# Altium PCB version1.PcbDoc
Units mm, origin at the board's own origin, x right, y up, seen from the top; angles counter-clockwise.
Board outline 125.09 x 91.69 mm, 2 copper layers (Top Layer, Bottom Layer); 43 components, 105 nets, 227 pads, 32 vias.
Unrouted connection lines stored in the file: 3.
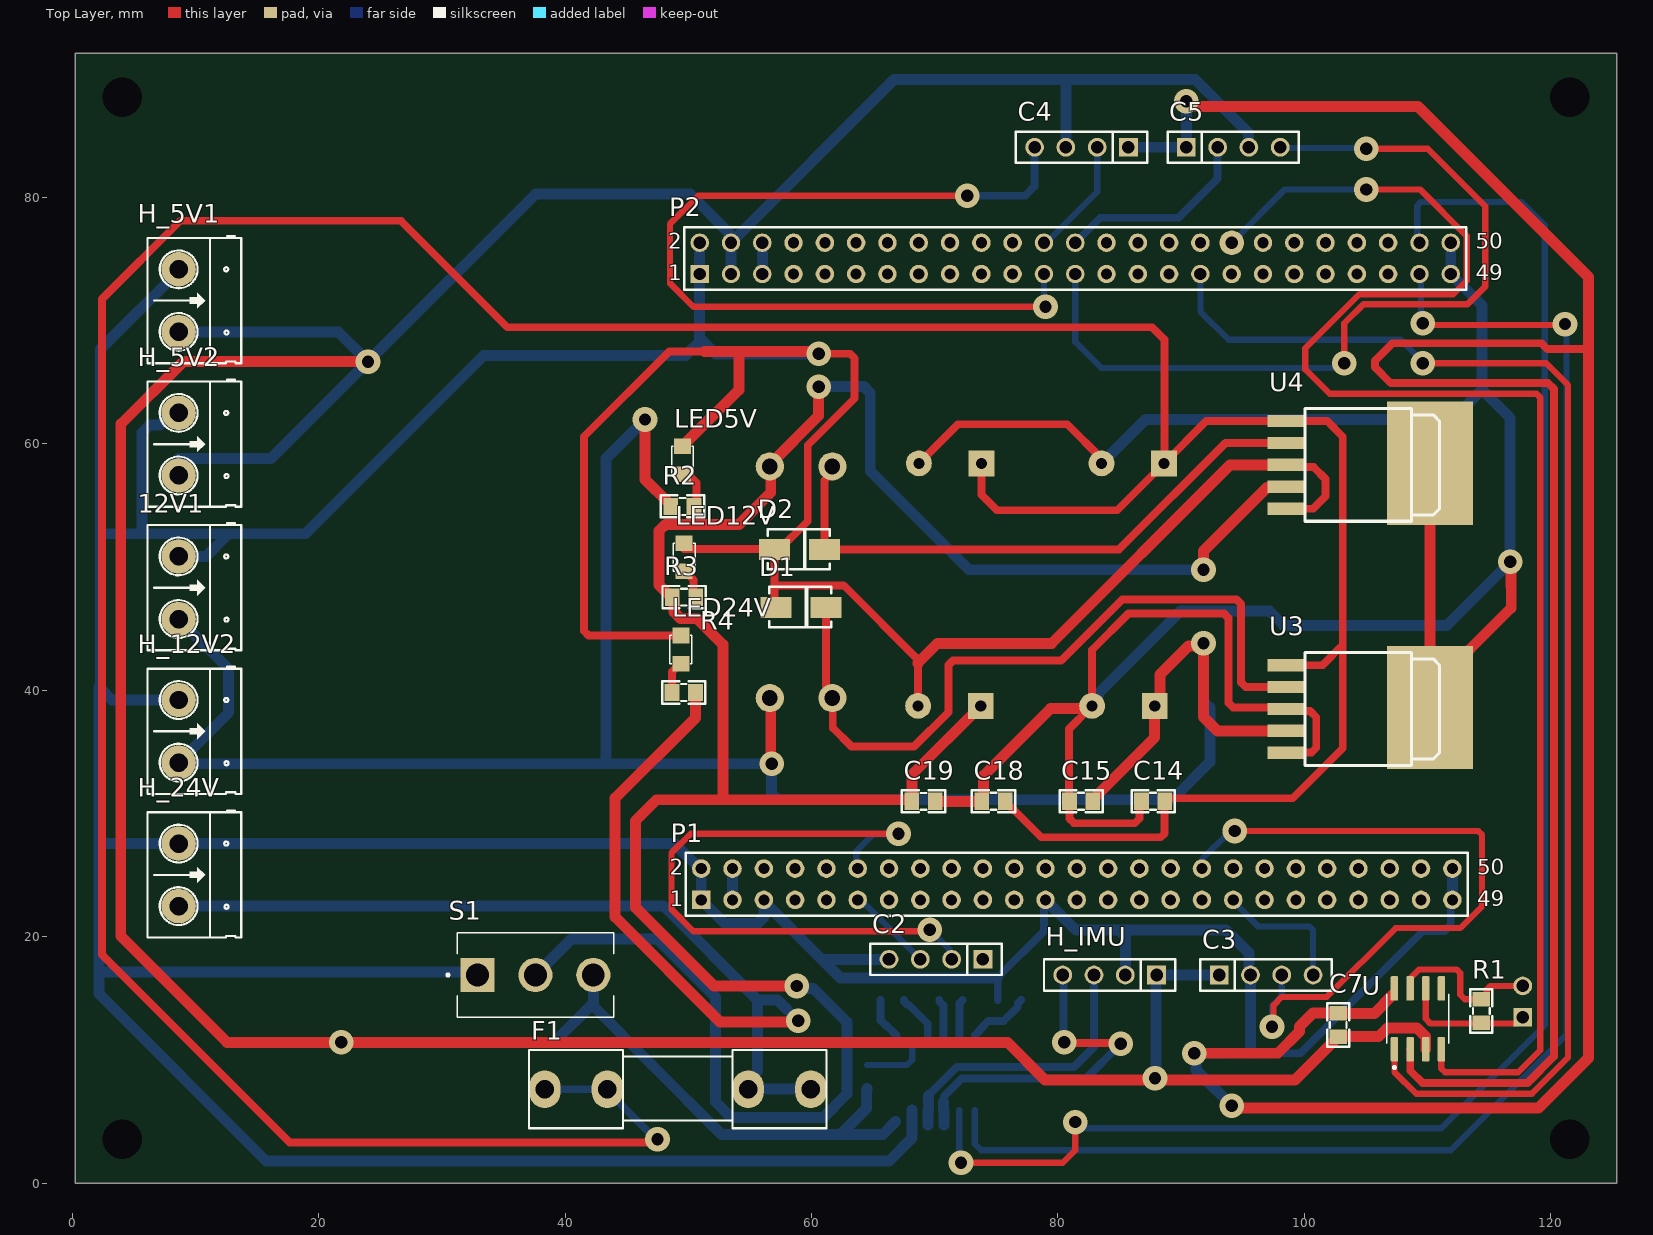
[diagram p0: Top Layer view]
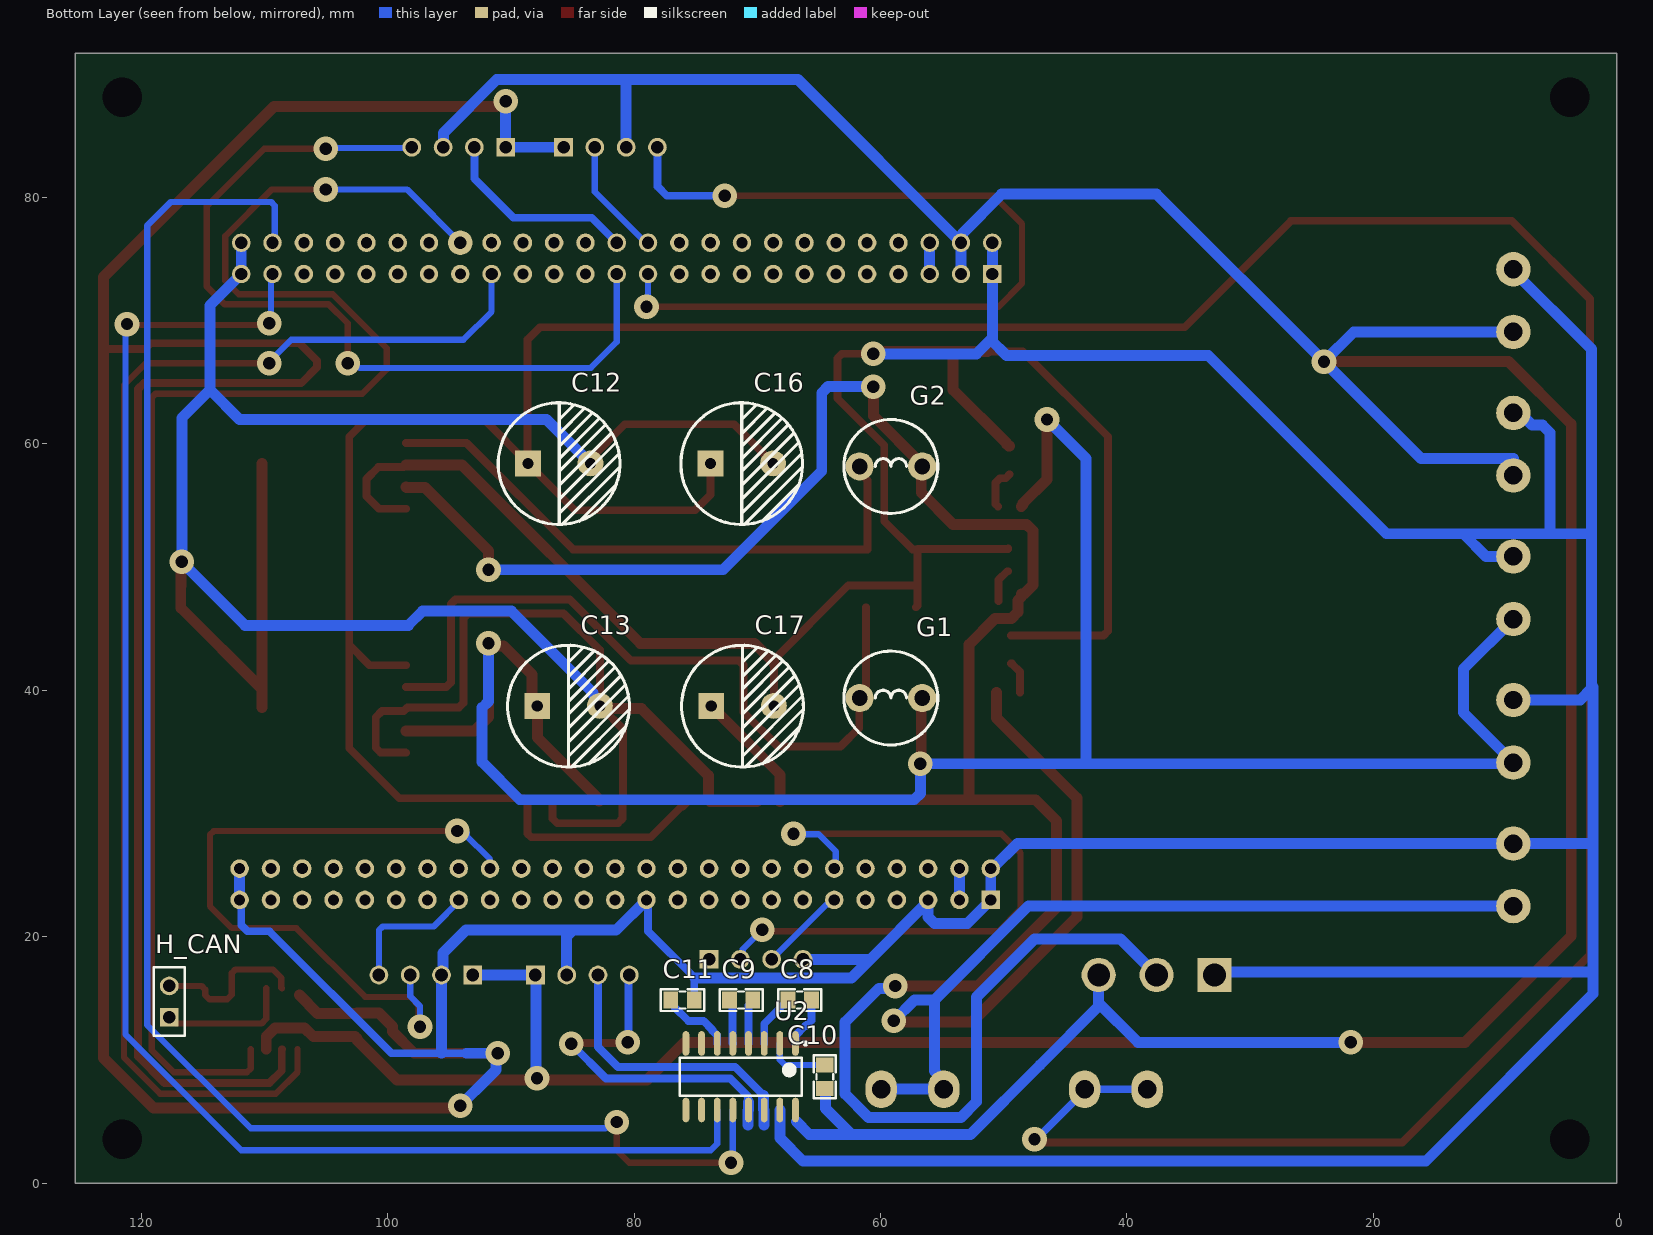
[diagram p1: Bottom Layer view, seen from below]
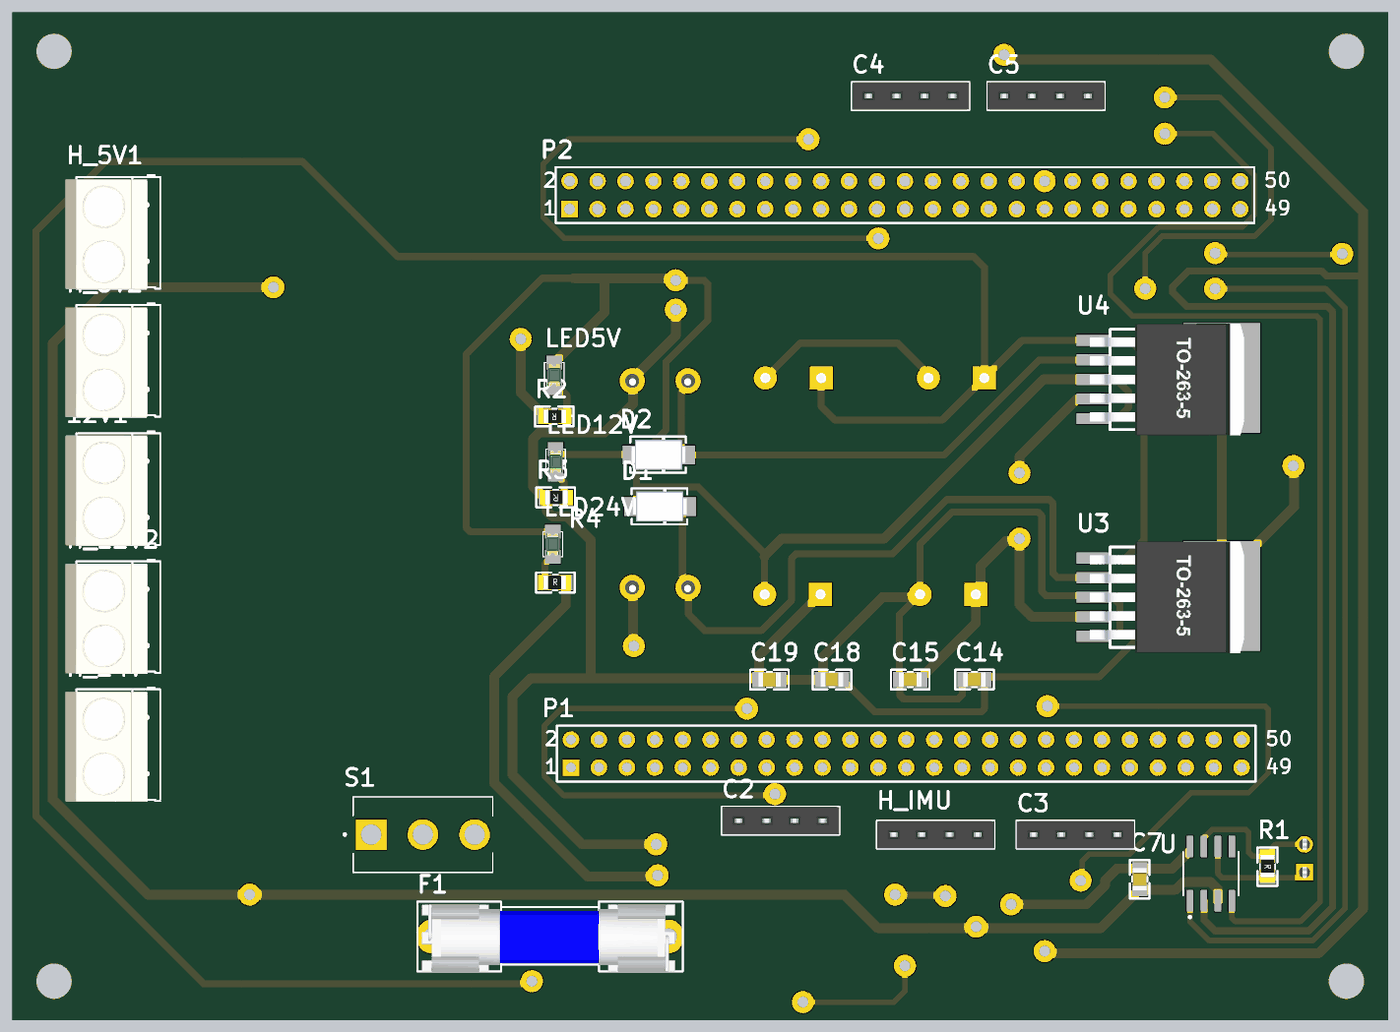
[diagram p2: 3D render of the assembled board from above, using the file's embedded part models]
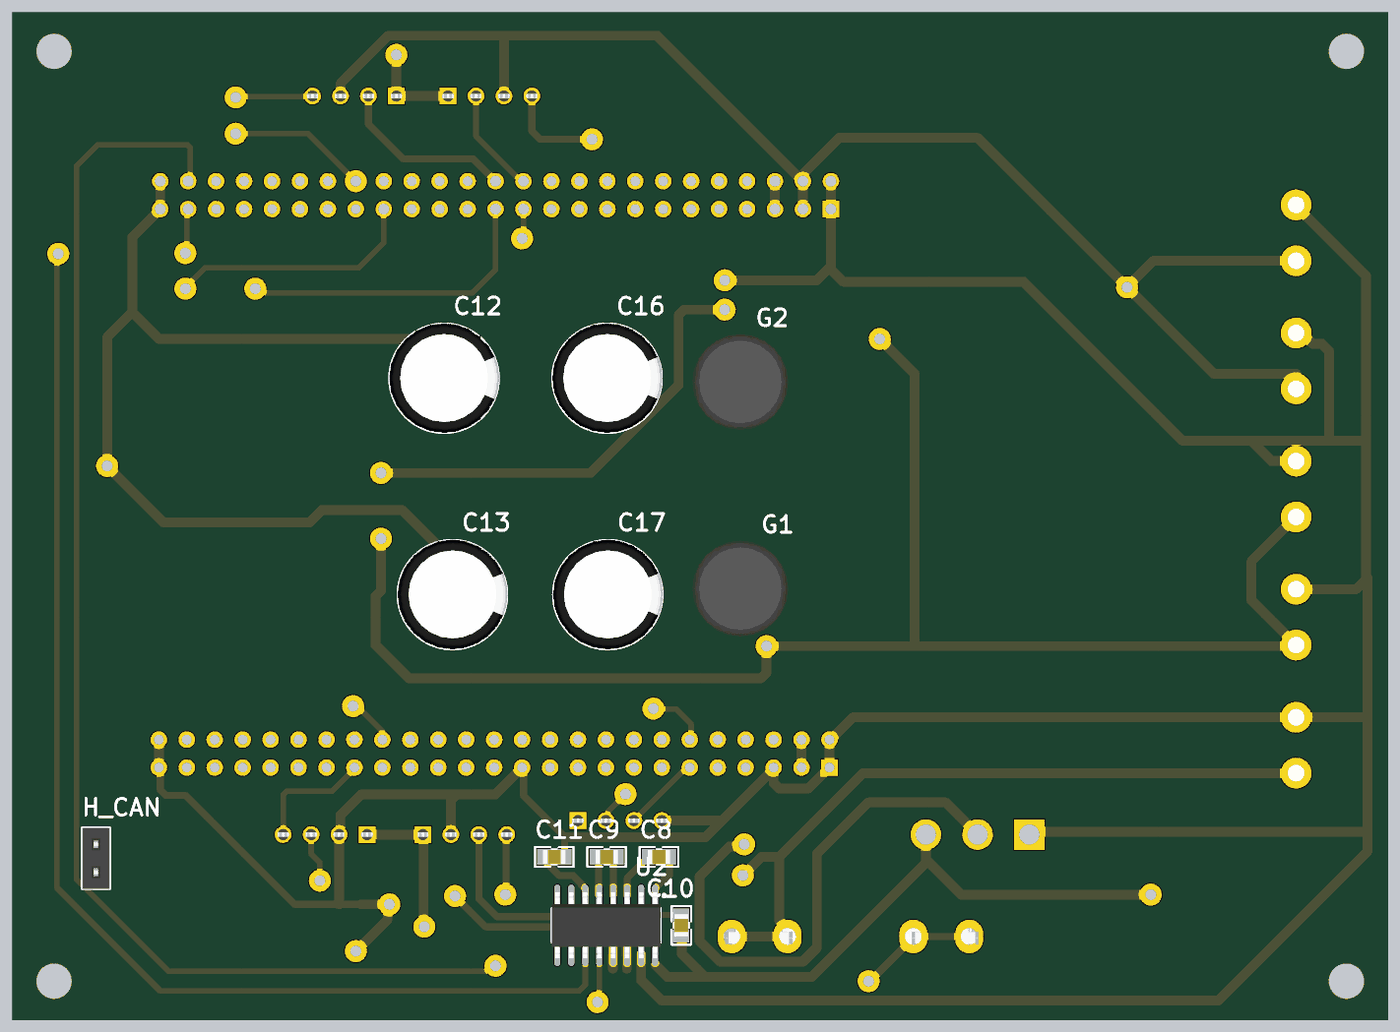
[diagram p3: 3D render of the assembled board from below, using the file's embedded part models]

## Layer stack, top to bottom
Top Solder: solder mask 0.0102, Solder Resist, Dk 3.5
Top Layer: signal copper 0.0356
Dielectric 1: dielectric 0.32, FR-4, Dk 4.8
Bottom Layer: signal copper 0.0356
Bottom Solder: solder mask 0.0102, Solder Resist, Dk 3.5

## Board outline
0.254,0 0.254,91.694 125.349,91.694 125.349,0

## Design rules (kind name [scope] priority, off if disabled: settings)
Clearance Clearance_2 [InNamedPolygon('GND_L01_P001')] p1: gap=0.508 ignorepadtopadclearanceinfootprint=FALSE
Clearance Clearance_1 [InNamedPolygon('GND_L02_P000')] p2: gap=0.508 ignorepadtopadclearanceinfootprint=FALSE
Clearance [All] p3: gap=0.3 ignorepadtopadclearanceinfootprint=FALSE
HoleSize HoleSize_1 [IsVia And InAnyNet And InLayerClass('All Layers')] p1: absolutevalues=TRUE maxlimit=2.54 minlimit=1 maxpercent=80.000 minpercent=20.000
HoleSize [All] p2: absolutevalues=TRUE maxlimit=2.54 minlimit=1 maxpercent=80.000 minpercent=20.000
PolygonConnect PolygonConnect_17 [All vs IsNamedPolygon('GND_L01_P001')] p1: connectstyle=Relief reliefconductorwidth=0.508 reliefentries=4 polygonreliefangle="90 Angle" airgapwidth=0.508
PolygonConnect PolygonConnect_16 [All vs IsNamedPolygon('GND_L02_P000')] p2: connectstyle=Relief reliefconductorwidth=0.508 reliefentries=4 polygonreliefangle="90 Angle" airgapwidth=0.508
PolygonConnect PolygonConnect_15 [All vs IsNamedPolygon('GND_L02_P000')] p3: connectstyle=Relief reliefconductorwidth=0.254 reliefentries=4 polygonreliefangle="90 Angle" airgapwidth=0.508
PolygonConnect PolygonConnect_14 [All vs IsNamedPolygon('GND_L01_P001')] p4: connectstyle=Relief reliefconductorwidth=0.508 reliefentries=4 polygonreliefangle="90 Angle" airgapwidth=0.508
PolygonConnect PolygonConnect_13 [All vs IsNamedPolygon('GND_L02_P000')] p5: connectstyle=Relief reliefconductorwidth=0.508 reliefentries=4 polygonreliefangle="90 Angle" airgapwidth=0.508
PolygonConnect PolygonConnect_12 [All vs IsNamedPolygon('GND_L01_P001')] p6: connectstyle=Relief reliefconductorwidth=0.508 reliefentries=4 polygonreliefangle="90 Angle" airgapwidth=0.508
PolygonConnect PolygonConnect_11 [All vs IsNamedPolygon('GND_L01_P001')] p7: connectstyle=Relief reliefconductorwidth=0.508 reliefentries=4 polygonreliefangle="90 Angle" airgapwidth=0.508
PolygonConnect PolygonConnect_10 [All vs IsNamedPolygon('GND_L02_P000')] p8: connectstyle=Relief reliefconductorwidth=0.508 reliefentries=4 polygonreliefangle="90 Angle" airgapwidth=0.508
PolygonConnect PolygonConnect_9 [All vs IsNamedPolygon('GND_L01_P001')] p9: thpad.connectstyle=Relief thpad.reliefconductorwidth=0.635 thpad.reliefentries=4 thpad.polygonreliefangle="90 Angle" thpad.airgapwidth=0.635 smdpad.connectstyle=Relief smdpad.reliefconductorwidth=0.635 smdpad.reliefentries=4 smdpad.polygonreliefangle="90 Angle" smdpad.airgapwidth=0.635 via.connectstyle=Relief via.reliefconductorwidth=0.254 via.reliefentries=4 via.polygonreliefangle="90 Angle" via.airgapwidth=0.254
PolygonConnect PolygonConnect_8 [All vs IsNamedPolygon('GND_L02_P000')] p10: connectstyle=Relief reliefconductorwidth=0.635 reliefentries=4 polygonreliefangle="90 Angle" airgapwidth=0.635
PolygonConnect PolygonConnect_7 [All vs IsNamedPolygon('GND_L01_P001')] p11: connectstyle=Relief reliefconductorwidth=0.635 reliefentries=4 polygonreliefangle="90 Angle" airgapwidth=0.635
PolygonConnect PolygonConnect_6 [All vs IsNamedPolygon('GND_L01_P000')] p12: connectstyle=Relief reliefconductorwidth=0.635 reliefentries=4 polygonreliefangle="90 Angle" airgapwidth=0.635
PolygonConnect PolygonConnect_5 [All vs IsNamedPolygon('GND_L01_P002')] p13: connectstyle=Relief reliefconductorwidth=0.635 reliefentries=4 polygonreliefangle="90 Angle" airgapwidth=0.635
PolygonConnect PolygonConnect_4 [All vs IsNamedPolygon('GND_L02_P000')] p14: connectstyle=Relief reliefconductorwidth=0.635 reliefentries=4 polygonreliefangle="90 Angle" airgapwidth=0.635
PolygonConnect PolygonConnect_3 [All vs IsNamedPolygon('GND_L01_P001')] p15: connectstyle=Relief reliefconductorwidth=0.635 reliefentries=4 polygonreliefangle="90 Angle" airgapwidth=0.635
PolygonConnect PolygonConnect_2 [All vs IsNamedPolygon('GND_L02_P000')] p16: connectstyle=Relief reliefconductorwidth=0.635 reliefentries=4 polygonreliefangle="90 Angle" airgapwidth=0.635
PolygonConnect PolygonConnect_1 [All vs IsNamedPolygon('GND_L02_P000')] p17: connectstyle=Relief reliefconductorwidth=0.635 reliefentries=4 polygonreliefangle="90 Angle" airgapwidth=0.635
PolygonConnect [All] p18: connectstyle=Relief reliefconductorwidth=0.254 reliefentries=4 polygonreliefangle="90 Angle" airgapwidth=0.254
RoutingTopology RoutingTopology_1 [IsPad And InAnyNet] p1: topology=Shortest
RoutingTopology [All] p2: topology=Shortest
RoutingVias RoutingVias_4 [IsVia And InAnyNet And InLayerClass('All Layers')] p1: holewidth=1 width=2 viastyle="Through Hole" minholewidth=1 minwidth=2 maxholewidth=1 maxwidth=2
RoutingVias RoutingVias_3 [IsVia And InAnyNet And InLayerClass('All Layers')] p2: holewidth=1 width=2 viastyle="Through Hole" minholewidth=1 minwidth=2 maxholewidth=1 maxwidth=2
RoutingVias RoutingVias_2 [IsVia And InAnyNet And InLayerClass('All Layers')] p3: holewidth=1 width=2 viastyle="Through Hole" minholewidth=1 minwidth=2 maxholewidth=1 maxwidth=2
RoutingVias RoutingVias_1 [IsVia And InAnyNet And InLayerClass('All Layers')] p4: holewidth=1 width=2 viastyle="Through Hole" minholewidth=1 minwidth=2 maxholewidth=1 maxwidth=2
RoutingVias [All] p5: holewidth=1 width=2 viastyle="Through Hole" minholewidth=1 minwidth=2 maxholewidth=1 maxwidth=2
SolderMaskExpansion [All] p1: expansion=0.102 istentingtop=FALSE
Width [All] p1: maxlimit=0.889 minlimit=0.254 preferedwidth=0.635
28 further rules are at their usual default settings.

## Components (designator, comment, footprint, x,y, rotation, side; value= is the part's Value field where it differs from the comment)
12V1 "Header 2" HED2 8.636,50.863 r270 top
C2 "JP4" JP4-C1T 73.914,18.161 r180 top
C3 "JP4" JP4-C1T 93.091,16.891 r0 top
C4 "JP4" JP4-C1T 85.725,84.074 r180 top
C5 "JP4" JP4-C1T 90.424,84.074 r0 top
C7 "104" "tu 0805" 102.743,12.827 r90 top
C8 "105" "tu 0805" 66.548,14.859 r0 bottom
C9 "105" "tu 0805" 71.31,14.859 r0 bottom
C10 "105" "tu 0805" 64.516,8.636 r270 bottom
C11 "105" "tu 0805" 76.073,14.859 r180 bottom
C12 "1000uF" "tu hoa 10mm" 86.081,58.42 r180 bottom
C13 "1000uF" "tu hoa 10mm" 85.319,38.735 r180 bottom
C14 "104" "tu 0805" 87.732,30.988 r180 top
C15 "104" "tu 0805" 81.89,30.988 r180 top
C16 "1000uF" "tu hoa 10mm" 71.26,58.42 r180 bottom
C17 "1000uF" "tu hoa 10mm" 71.196,38.735 r180 bottom
C18 "104" "tu 0805" 74.778,30.988 r180 top
C19 "104" "tu 0805" 69.088,30.988 r0 top
D1 "SS34" DIODE_DO214AC_SMA 59.157,46.736 r0 top
D2 "SS34" DIODE_DO214AC_SMA 59.03,51.435 r0 top
F1 "F1A" Fuse 49.149,7.62 r180 top value=Fuse
G1 "100uH 3A" "CUON CAM 100uH3A" 59.157,39.37 r180 bottom
G2 "100uH 3A" "CUON CAM 100uH3A" 59.157,58.166 r180 bottom
H_5V1 "Header 2" HED2 8.636,74.168 r270 top
H_5V2 "Header 2" HED2 8.636,62.516 r270 top
H_12V2 "Header 2" HED2 8.636,39.211 r270 top
H_24V "Header 2" HED2 8.636,27.559 r270 top
H_CAN "JP2" JP2-C1T 117.729,13.462 r90 bottom
H_IMU "JP4" JP4-C1T 88.011,16.891 r180 top
LED5V "LED" LED-0805-Green 49.53,57.531 r90 top value="LED 3 - 5 ly 2 Colour"
LED12V "LED" LED-0805-Green 49.657,49.657 r90 top value="LED 3 - 5 ly 2 Colour"
LED24V "LED" LED-0805-Green 49.403,42.164 r90 top value="LED 3 - 5 ly 2 Colour"
P1 "Header 25X2" HDR2X25#1 51.054,22.987 r0 top
P2 "Header 25X2" HDR2X25#2 50.927,73.787 r0 top
R1 "1k" "tro smd 0805" 114.427,13.97 r270 top
R2 "1k" "tro smd 0805" 49.53,54.864 r180 top
R3 "1k" "tro smd 0805" 49.657,47.498 r180 top
R4 "1k" "tro smd 0805" 49.632,39.878 r0 top
S1 "100SP3T1B1M2QE" SW_100SP3T1B1M2QE 37.592,16.891 r0 top
U "SN65HVD230" SOIC127P599X175-8N 109.22,13.335 r90 top
U2 "MAX232" SO16 71.349,8.636 r270 bottom
U3 "LM2576HVS 12.0V SMD" TO263-5 104.369,38.481 r270 top
U4 "LM2576HVS 5.0V SMD" TO263-5 104.369,58.293 r270 top

## Footprints (in the part's own frame and the unit in brackets; to place one, negate y for a bottom-side part, rotate by r counter-clockwise, add the part's x,y. Pads: shape width x height; smd on the part's side, far side on the other; paste and mask are expansions set on the pad)
"CUON CAM 100uH3A" [mil] "100uH3A"
  round 90 hole 50: 1(-100,0) 2(100,0)
  silkscreen extent -150,-150 150,150, body extent -171,-175 171,167, height 394
DIODE_DO214AC_SMA [mm] "Diode 2214AC- SMA type"
  rect 2.5x1.7 smd: 1(-2.032,0) 2(2.032,0)
  silkscreen extent -2.59,-1.63 2.46,1.7, body extent -2.53,-1.35 2.47,1.35, height 2.25
Fuse [mm] "De Fuse"
  oval 2.54x3.048 hole 1.5: 1(-10.795,0) 1(-5.715,0) 2(5.715,0) 2(10.795,0)
  silkscreen extent -12.06,-3.18 12.06,3.18, body extent -11.38,-2.97 11.66,3.23, height 9.6
HDR2X25#1 [mm] "Connector; Header; 25x2 Position"
  rect 1.5x1.5 hole 0.9: 1(0,0)
  round 1.5 hole 0.9: 2(0,2.54) 3(2.54,0) 4(2.54,2.54) 5(5.08,0) 6(5.08,2.54) 7(7.62,0) 8(7.62,2.54) 9(10.16,0) 10(10.16,2.54) 11(12.7,0) 12(12.7,2.54) 13(15.24,0) 14(15.24,2.54) 15(17.78,0) 16(17.78,2.54) 17(20.32,0) 18(20.32,2.54) 19(22.86,0) 20(22.86,2.54) 21(25.4,0) 22(25.4,2.54) 23(27.94,0) 24(27.94,2.54) 25(30.48,0) 26(30.48,2.54) 27(33.02,0) 28(33.02,2.54) 29(35.56,0) 30(35.56,2.54) 31(38.1,0) 32(38.1,2.54) 33(40.64,0) 34(40.64,2.54) 35(43.18,0) 36(43.18,2.54) 37(45.72,0) 38(45.72,2.54) 39(48.26,0) 40(48.26,2.54) 41(50.8,0) 42(50.8,2.54) 43(53.34,0) 44(53.34,2.54) 45(55.88,0) 46(55.88,2.54) 47(58.42,0) 48(58.42,2.54) 49(60.96,0) 50(60.96,2.54)
  silkscreen extent -1.27,-1.27 62.23,3.81
HDR2X25#2 [mm] "Connector; Header; 25x2 Position"
  rect 1.5x1.5 hole 1: 1(0,0)
  round 1.5 hole 1: 2(0,2.54) 3(2.54,0) 4(2.54,2.54) 5(5.08,0) 6(5.08,2.54) 23(27.94,0) 24(27.94,2.54) 25(30.48,0) 26(30.48,2.54) 33(40.64,0) 47(58.42,0) 48(58.42,2.54) 49(60.96,0) 50(60.96,2.54)
  round 1.5 hole 0.9: 7(7.62,0) 8(7.62,2.54) 9(10.16,0) 10(10.16,2.54) 11(12.7,0) 12(12.7,2.54) 13(15.24,0) 14(15.24,2.54) 15(17.78,0) 16(17.78,2.54) 17(20.32,0) 18(20.32,2.54) 19(22.86,0) 20(22.86,2.54) 21(25.4,0) 22(25.4,2.54) 27(33.02,0) 28(33.02,2.54) 29(35.56,0) 30(35.56,2.54) 31(38.1,0) 32(38.1,2.54) 34(40.64,2.54) 35(43.18,0) 37(45.72,0) 38(45.72,2.54) 39(48.26,0) 40(48.26,2.54) 41(50.8,0) 42(50.8,2.54) 43(53.34,0) 44(53.34,2.54) 45(55.88,0) 46(55.88,2.54)
  round 2 hole 1: 36(43.18,2.54)
  silkscreen extent -1.27,-1.27 62.23,3.81
HED2 [mil] "Header 2, 2 pin, hight 300mil, Pin to Pin 200, Colour Green"
  round 110 hole 59.06: 1(0,0) 2(200,0)
  silkscreen extent -106,-100 300,200, body extent -92,-140 302,155, height 394
JP2-C1T [mm] "2 row, straight, gold plating"
  rect 1.52x1.52 hole 1.02: 1(0,0)
  round 1.52 hole 1.02: 2(2.54,0)
  silkscreen extent -1.52,-1.27 4.06,1.27, body extent -1.52,-1.25 4.06,1.25, height 8.51
JP4-C1T [mm] "4 row, straight, gold plating"
  rect 1.52x1.52 hole 1.02: 1(0,0)
  round 1.52 hole 1.02: 2(2.54,0) 3(5.08,0) 4(7.62,0)
  silkscreen extent -1.52,-1.27 9.14,1.27, body extent -1.52,-1.25 9.14,1.25, height 8.51
LED-0805-Green [mil]
  rect 50x55 smd: 1(0,0) 2(90,0)
  silkscreen extent 0,-35 90,35, body extent 5,-25 85,25, height 43
SO16 [mm] "SOIC, 16-Leads, Body 9.90x3.91mm, Pitch 1.27mm, IPC Medium Density"
  oval 2x0.55 smd: 1(-2.7,4.445) 2(-2.7,3.175) 3(-2.7,1.905) 4(-2.7,0.635) 5(-2.7,-0.635) 6(-2.7,-1.905) 7(-2.7,-3.175) 8(-2.7,-4.445) 9(2.7,-4.445) 10(2.7,-3.175) 11(2.7,-1.905) 12(2.7,-0.635) 13(2.7,0.635) 14(2.7,1.905) 15(2.7,3.175) 16(2.7,4.445)
  silkscreen extent -2.82,-4.95 1.55,5.39, body extent -3,-4.95 3,4.95, height 1.4
SOIC127P599X175-8N [mm]
  rrect25% 1.97x0.6 smd: 1(-2.47,1.905) 2(-2.47,0.635) 3(-2.47,-0.635) 4(-2.47,-1.905) 5(2.47,-1.905) 6(2.47,-0.635) 7(2.47,0.635) 8(2.47,1.905)
  silkscreen extent -4.05,-2.52 1.99,2.52
SW_100SP3T1B1M2QE [mm]
  rect 2.775x2.775 / inner round 2.775 / far side rect 2.775x2.775 hole 1.85: 1(-4.7,0)
  round 2.775 hole 1.85: 2(0,0) 3(4.7,0)
  silkscreen extent -7.2,-3.43 6.35,3.43
TO263-5 [mil] "TO263-5"
  rect 39.37x120 smd: 1(-140,-230) 2(-70,-230) 3(0,-230) 4(70,-230) 5(140,-230)
  rect 393.7x275.59 smd: 6(-5,230)
  silkscreen extent -180,-170 180,260, body extent -200,-242 200,310, height 180
"tro smd 0805" [mm]
  rect 1.2x1.4 smd: 1(-0.946,-0.061) 2(0.954,-0.061)
  silkscreen extent -1.75,-0.97 1.75,0.84, body extent -1.56,-0.76 1.44,0.64, height 0.53
"tu 0805" [mm] "Compoment SMD 80x50mil"
  rect 1.2x1.4 smd: 1(-0.946,-0.003) 2(0.954,-0.003)
  silkscreen extent -1.75,-0.89 1.75,0.89, body extent -1.01,-0.64 1.01,0.63, height 0.61
"tu hoa 10mm" [mm]
  rect 2.1x2.1 hole 0.9: 1(-2.54,0)
  round 2.1 hole 0.9: 2(2.54,0)
  silkscreen extent -4.95,-4.96 4.93,4.92, body extent -5,-5 5.01,5, height 20.01

## Part data
12V1 H_5V1 H_5V2 H_12V2 H_24V: "Header, 2-Pin", Manufacturer="Generic Components", Class=Connector
C2 C3 C4 C5 H_IMU: "WR-PHD 2.54 mm Angled Socket Header", Manufacturer="W¨¹rth Elektronik eiSos GmbH", partNo=613004143121, ComponentLink1 Description=Manufacturer, ComponentLink1URL=http://www.we-online.com, ComponentLink2 Description=Datasheet, ComponentLink2URL=http://katalog.we-online.de/em/datasheet/6130xx143121.pdf, Created by="Karrer Zheng", Created Date="29 March 2013", NoPins=04
C7 C14 C15 C18 C19: library part "Tu 0805 104 50V 10%", "Dán", Chung_Loai=Dán, Don_Vi=Con, Ma_Hang=MH004551, So_Chan=2, Ten_Linh_Kien="Tụ 0805 104-100nF 10% 50V"
C8 C9 C10 C11: library part "Tu 0805 105 50V 10%", "Dán", Chung_Loai=Dán, Don_Vi=Con, Ma_Hang=MH004552, So_Chan=2, Ten_Linh_Kien="Tụ 0805 105-1uF 10% 50V"
C12 C13 C16 C17: library part "Tu Hoa 1000uF 10V 10x12", "Cắm", Chung_Loai=Cắm, Don_Vi=Con, Ma_Hang=MH006614, So_Chan=2, Ten_Linh_Kien="Tụ Hóa 1000uF 10V 10x12MM"
D1 D2: "DIODE SCHOTTKY 40V 3A SMA", MPN=SS34, Solder=SMT
F1: library part Fuse, "Fuse", Designed by=VanDungEvn
G1 G2: library part "CUON CAM 100uH DIP", "Dán", Chung_Loai=Dán, Don_Vi=Con, Ma_Hang=MH002209, Ten_Linh_Kien="Cuộn Cảm 100uH 3A 8x10MM"
H_CAN: "WR-PHD 2.54 mm Angled Socket Header", Manufacturer="W¨¹rth Elektronik eiSos GmbH", partNo=613002143121, ComponentLink1 Description=Manufacturer, ComponentLink1URL=http://www.we-online.com, ComponentLink2 Description=Datasheet, ComponentLink2URL=http://katalog.we-online.de/em/datasheet/6130xx143121.pdf, Created by="Karrer Zheng", Created Date="29 March 2013", NoPins=02
LED5V LED12V LED24V: library part "LED SMD"
P1 P2: "Header, 25-Pin, Dual row", LatestRevisionDate=17-Jul-2002, LatestRevisionNote="Re-released for DXP Platform.", Publisher="Altium Limited"
R1 R2 R3 R4: library part "Tro 0805 1% 470k", "Dán", Chung_Loai=Dán, Don_Vi=Con, Ma_Hang=MH005485, So_Chan=2, Ten_Linh_Kien="Trở 0805 1% 470k"
S1: Package=None, Availability=Unavailable, MF="{'manufacturer': u'E-Switch'}", MP=100SP3T1B1M2QE, Price=None
U: "1/1 Transceiver Half CANbus 8-SOIC", Package="SOIC-8 Texas Instruments", Availability=Unavailable, MF="Texas Instruments", MP=SN65HVD230, Price=None, SnapEDA_Link=https://www.snapeda.com/parts/SN65HVD230/Texas%20Instruments/view-part/558072/?ref=snap
U2: "RS232 LEVEL SHIFTER", Manufacturer="Texas Instruments", Manufacturer Part Number=MAX232DR, Package / Case="16-SOIC (3.9mm Width)", Supplier Part Number=296-14619-1-ND, Voltage - Supply="4.5 V ~ 5.5 V", Category="Integrated Circuits (ICs)", Number of Drivers/Receivers=2/2, Packaging="Cut Tape (CT)", Protocol=RS232, RoHS="RoHS Compliant", Supplier=Digi-Key, Supplier 1=Digi-Key, Supplier Part Number 1=296-14619-1-ND, Type=Transceiver
U3: library part "LM2576HVS 5.0V SMD", "Dán", Chung_Loai=Dán, Don_Vi=Con, Ma_Hang=MH002362, Ten_Linh_Kien="LM2576HVS-5.0V BUCK 5V 3A TO263-5"
U4: "Dán", Chung_Loai=Dán, Don_Vi=Con, Ma_Hang=MH002362, Ten_Linh_Kien="LM2576HVS-5.0V BUCK 5V 3A TO263-5"

## Free pads (board coordinates)
  round 1.524 hole 3.2: 3(4.064,88.138) 4(4.064,3.556) 5(121.539,3.556) 6(121.539,88.138)

## Via types
v1: diameter 2, hole 1, Top Layer to Bottom Layer, 30 vias
v2: diameter 2/2 (per signal layer), hole 1, Top Layer to Bottom Layer, 2 vias

## Nets (pads, with @x,y where several pads share a name; then routed paths per layer and width w, separated by ;. In a path a pad name is that pad's centre, name@x,y a point inside that pad or via, vN(x,y) a via of type N, cw(c..) or ccw(c..) an arc to the next point about the centre after c; other vN are vias at no path point)
3.3V: C2.1 P2.5 P2.6 | length 2.5
  Bottom Layer w0.889: P2.5 P2.6
5V: C3.1 C4.3 C5.3 C7.1 C10.2 H_5V1.2 H_5V2.2 H_IMU.1 P2.3 P2.4 S1.3 U2.16 U.3 | length 379.8
  Top Layer w0.635: U.3@109.837,10.883 U.3
  Top Layer w0.889: v1(24.003,66.675) 9.017,66.675 3.937,61.595 3.937,20.066 12.573,11.43 v1(21.844,11.43) 75.914,11.43 78.962,8.382 87.757,8.382 v1(87.884,8.509) 88.011,8.382 99.247,8.382 102.491,11.626 102.491,11.726 C7.1@102.646,11.881 ; C7.1 C7.1@102.646,11.881 ; U.3 109.855,11.881 109.629,12.107 109.629,12.114 109.149,12.595 106.751,12.595 106.037,11.881 C7.1@102.646,11.881
  Bottom Layer w0.889: H_5V2.2@8.636,58.801 16.129,58.801 v1(24.003,66.675) ; H_5V1.2@8.763,69.088 21.59,69.088 v1(24.003,66.675) ; v1(21.844,11.43) 39.116,11.43 42.292,14.606 42.292,16.551 S1.3 ; 42.292,14.35 47.073,9.569 52.705,3.937 62.357,3.937 ; P2.3 P2.4 ; C10.2 64.519,7.566 64.48,7.526 64.48,6.06 62.357,3.937 ; U2.16@66.833,4.984 65.786,3.937 62.357,3.937 ; C4.3 80.645,89.434 80.772,89.561 ; v1(87.884,8.509) 87.947,8.572 87.947,16.828 H_IMU.1 C3.1 ; C5.3 95.478,84.1 95.478,85.23 91.147,89.561 80.772,89.561 ; v1(24.003,66.675) 37.592,80.264 50.165,80.264 53.35,77.079 53.35,76.444 P2.4 ; P2.4 66.701,89.561 80.772,89.561
5V.1: C17.1 C19.1 G2.2 R3.2 S1.2 U4.4 | length 202.4
  Top Layer w0.889: v1(58.801,16.002) 52.098,16.002 45.72,22.38 45.72,29.408 47.427,31.115 52.832,31.115 ; v1(60.579,64.643) 60.579,62.281 56.629,58.331 56.629,58.229 56.693,58.166 56.693,56.058 54.102,53.467 48.146,53.467 47.625,52.946 47.625,48.536 48.347,47.814 48.547,47.814 48.547,47.614 48.858,47.303 48.858,46.35 49.379,45.829 50.7,45.829 52.832,43.698 52.832,31.115 ; C17.1 68.142,33.141 C19.1 68.012,31.115 52.832,31.115 ; v1(91.821,49.784) v1(91.821,49.784) 91.82,51.307 96.972,56.459 98.471,56.459 U4.4
  Bottom Layer w0.889: S1.2 40.513,19.812 47.498,19.812 52.197,15.113 52.197,6.604 53.467,5.334 60.96,5.334 62.865,7.239 62.865,13.081 60.134,15.812 58.991,15.812 v1(58.801,16.002) ; v1(60.579,64.643) 64.249,64.643 64.77,64.122 64.77,57.785 72.771,49.784 v1(91.821,49.784)
12V: 12V1.2 C13.1 C15.1 G1.2 H_12V2.2 R2.2 U3.4 | length 185.4
  Top Layer w0.635: G1.2@56.515,39.268 G1.2
  Top Layer w0.889: v1(46.482,61.976) 46.482,57.118 48.42,55.18 48.42,55.08 R2.2 ; G1.2@56.515,39.268 56.693,39.091 56.693,34.112 v1(56.769,34.036) ; C15.1 82.991,31.147 82.991,31.302 87.859,36.17 C13.1 88.277,39.153 88.277,41.287 90.592,43.602 91.608,43.602 v1(91.821,43.815) 91.821,37.846 92.964,36.703 U3.4
  Bottom Layer w0.889: 12V1.2 12.7,41.719 12.7,38.195 9.557,35.052 H_12V2.2 8.731,34.036 43.307,34.036 ; v1(46.482,61.976) 43.307,58.801 43.307,34.036 ; v1(91.821,43.815) 91.821,39.093 92.329,38.585 92.329,34.163 89.281,31.115 57.29,31.115 56.769,31.636 v1(56.769,34.036) 43.307,34.036
24V: F1.1 H_24V.2 R4.2 | length 106
  Top Layer w0.889: R4.2 50.586,37.759 44.069,31.242 44.069,21.59 52.578,13.081 58.835,13.081 v1(58.928,13.174)
  Bottom Layer w0.889: H_24V.2@8.801,22.479 48.006,22.479 55.626,14.859 ; v1(58.928,13.174) 57.243,14.859 55.626,14.859 ; F1.1@59.944,7.62 54.864,7.62 54.864,8.321 55.626,9.083 55.626,14.859
BOOT0: P2.21
GND: 12V1.1 C2.4 C3.2 C4.1 C5.1 C7.2 C11.2 C12.2 C13.2 C14.2 C15.2 C16.2 C17.2 C18.2 C19.2 D1.1 D2.1 H_5V1.1 H_5V2.1 H_12V2.1 H_24V.1 H_IMU.2 LED5V.2 LED12V.2 LED24V.2 P1.1 P1.2 P1.5 P1.23 P1.49 P1.50 P2.1 P2.2 P2.49 P2.50 S1.1 U2.15 U3.3 U3.5 U3.6 U4.3 U4.5 U4.6 U.2 U.8 | length 1061.6
  Top Layer w0.635: LED24V.2 41.901,44.45 41.529,44.822 41.529,60.579 48.45,67.501 51.308,67.501 ; LED12V.2@49.632,51.498 49.663,51.467 56.965,51.467 D2.1 ; D1.1 56.997,46.863 56.997,48.514 ; v1(60.579,67.31) 63.128,67.31 63.5,66.938 63.5,63.7 59.69,59.89 59.69,53.728 57.397,51.435 D2.1 ; C17.2 68.656,42.177 ; C16.2 71.895,61.595 80.762,61.595 83.541,58.816 C12.2 ; 68.77,42.355 62.611,48.514 56.997,48.514 ; C13.2@82.547,38.503 80.899,36.855 80.899,31.028 C15.2 80.935,29.592 81.317,29.21 86.242,29.21 86.614,29.582 86.614,30.828 C14.2 ; C13.2 82.779,43.282 85.725,46.228 93.481,46.228 93.853,45.856 93.853,38.98 94.225,38.608 98.4,38.608 U3.3 98.691,38.317 100.464,38.317 100.965,37.816 100.965,35.332 100.593,34.96 98.561,34.96 U3.5 ; U4.5 100.711,54.737 101.727,55.753 101.727,57.15 100.767,58.11 98.709,58.11 U4.3 ; U.2 108.603,10.848 108.603,9.126 109.601,8.128 118.11,8.128 120.269,10.287 120.269,64.452 119.791,64.931 107.027,64.931 105.737,66.221 105.737,66.748 107.154,68.165 119.249,68.165 119.723,67.691 123.063,67.691 ; 56.997,48.514 D2.1
  Top Layer w0.889: LED5V.2 49.593,59.817 49.784,60.008 49.784,60.071 54.102,64.389 54.102,67.501 ; 51.308,67.501 54.102,67.501 ; v1(60.579,67.31) 60.389,67.501 54.102,67.501 ; 68.656,42.177 68.656,42.24 68.77,42.355 70.231,43.815 79.502,43.815 93.98,58.293 U4.3 ; C19.2 70.046,30.988 73.82,30.988 C18.2 73.979,31.147 73.979,33.085 79.397,38.503 82.547,38.503 C13.2 ; v1(90.424,87.817) 90.725,87.817 91.166,87.376 109.22,87.376 123.063,73.533 123.063,67.691 123.063,10.16 118.999,6.096 94.299,6.096 v1(94.107,6.288) ; v1(91.059,10.541) 97.844,10.541 99.613,12.31 99.613,12.712 100.713,13.812 102.491,13.812 102.522,13.781 C7.2 105.687,13.781 U.8@107.17,15.264 ; U3.6 U3.6@110.211,40.108 ; U4.6 U3.6@110.211,40.108 ; v1(116.713,50.419) 116.786,50.346 116.786,48.465 116.798,48.453 116.798,46.695 U3.6@110.211,40.108
  Bottom Layer w0.635: 75.057,16.637 75.119,16.699 ; C11.2 75.119,16.699 ; P1.23@78.867,22.987 78.867,20.447 75.119,16.699 ; v1(90.424,87.817) v1@90.551,87.69 ; 93.601,10.541 95.631,10.541 99.695,10.541 109.601,20.447 111.379,20.447 111.887,20.955 P1.49@111.887,22.987
  Bottom Layer w0.889: 2.68,52.705 5.658,52.705 ; H_12V2.1 3.207,39.211 2.286,40.132 ; 12V1.1 10.858,50.863 12.7,52.705 ; H_5V2.1 8.121,62.516 7.136,61.531 6.286,61.531 5.658,60.903 5.658,52.705 ; H_5V1.1@8.763,74.168 2.286,67.691 2.286,40.132 ; S1.1@32.03,17.145 2.159,17.145 ; P1.2@50.927,25.527 48.895,27.559 H_24V.1 2.286,27.559 2.159,27.432 ; P2.2 P2.1 50.927,68.58 52.197,67.31 v1(60.579,67.31) ; P1.2 P1.1 52.959,21.082 55.613,21.082 56.134,21.603 P1.5@56.134,22.86 ; 51.054,68.453 49.784,67.183 33.401,67.183 18.923,52.705 12.7,52.705 ; P1.5 P1.5@56.134,22.86 ; C2.4 60.833,18.161 ; U2.15 68.174,3.658 66.294,1.778 15.748,1.778 2.159,15.367 2.159,17.145 ; 75.057,16.637 62.357,16.637 60.833,18.161 ; P1.23 81.453,20.528 84.95,20.528 ; C13.2 82.779,39.063 83.317,39.601 83.317,39.789 89.946,46.419 97.185,46.419 98.328,45.276 111.569,45.276 v1(116.713,50.419) 116.713,62.103 114.427,64.389 ; C12.2 87.097,61.976 112.014,61.976 114.427,64.389 ; H_IMU.2 85.471,20.007 84.95,20.528 ; C4.1 C5.1 v1(90.424,87.817) ; 93.601,10.541 v1(91.059,10.541) 91.217,10.383 91.217,9.177 91.815,8.58 v1(94.107,6.288) ; 95.631,10.541 C3.2 95.51,17.012 95.51,18.663 93.645,20.528 84.95,20.528 ; P2.50 P2.49 114.427,71.247 114.427,64.389 ; P1.49 P1.50 ; 2.159,17.145 2.159,27.432 ; 2.159,27.432 2.159,40.259 2.286,40.132 ; 5.658,52.705 12.7,52.705 ; P1.5@56.134,22.86 60.833,18.161
IMU_RX: H_IMU.3 U2.14 | length 23.4
  Bottom Layer w0.635: 69.486,7.107 71.803,9.423 81.307,9.423 82.931,11.048 H_IMU.3
  Bottom Layer w0.889: 69.469,4.699 69.469,5.911 U2.14 69.486,5.978 69.486,7.107
IMU_TX: H_IMU.4 U2.13 | length 28.6
  Top Layer w0.635: v1(80.518,11.43) 80.581,11.367 85.026,11.367 v1(85.09,11.303)
  Bottom Layer w0.635: U2.13@70.756,6.618 70.756,7.054 72.19,8.488 82.275,8.488 v1(85.09,11.303) ; H_IMU.4 80.454,16.828 80.454,11.493 v1(80.518,11.43)
  Bottom Layer w0.889: U2.13@70.714,6.576 U2.13 70.739,5.911 70.739,4.699
NetC8_1: C8.1 U2.1 | length 4.1
  Bottom Layer w0.635: C8.1 65.602,13.21 66.051,12.761 66.119,12.761 66.904,11.976 U2.1
NetC8_2: C8.2 U2.3 | length 4.4
  Bottom Layer w0.635: C8.2 67.502,14.762 67.785,14.48 67.885,14.48 69.444,12.921 U2.3
NetC9_1: C9.1 U2.4 | length 3.7
  Bottom Layer w0.635: C9.1 70.365,14.762 70.714,14.414 U2.4
NetC9_2: C9.2 U2.5 | length 3.6
  Bottom Layer w0.635: U2.5 72.026,11.379 72.026,14.624 C9.2
NetC10_1: C10.1 U2.2 | length 5.2
  Bottom Layer w0.508: C10.1 67.748,9.582 68.174,10.008 U2.2
NetC11_1: C11.1 U2.6 | length 5.8
  Bottom Layer w0.635: U2.6 73.254,11.976 73.631,12.354 73.631,12.431 74.366,13.165 75.602,13.165 76.736,14.3 76.736,14.573 C11.1
NetC12_1: C12.1 C14.1 C16.1 C18.1 F1.2 U3.1 U4.1 | length 318.2
  Top Layer w0.635: v1(47.498,3.556) 47.244,3.302 17.653,3.302 2.413,18.542 2.413,71.755 8.763,78.105 26.67,78.105 35.306,69.469 87.639,69.469 88.646,68.462 88.646,66.022 88.646,58.445 C12.1 ; C16.1 73.8,55.867 75.057,54.61 84.811,54.61 C12.1 ; C18.1 75.723,30.891 76.069,30.545 76.169,30.545 78.648,28.067 88.348,28.067 88.646,28.365 88.646,30.96 88.928,31.242 99.06,31.242 103.124,35.306 103.124,43.688 ; U3.1 101.473,42.037 103.124,43.688 ; C12.1 92.05,61.849 U4.1 101.854,61.849 103.124,60.579 103.124,43.688
  Bottom Layer w0.635: F1.2@38.354,7.62 43.434,7.62 43.434,7.493 47.371,3.556 v1(47.498,3.556)
NetD1_2: D1.2 G1.1 U3.2 | length 61.3
  Top Layer w0.635: D1.2 61.188,46.735 61.188,40.326 61.697,39.817 G1.1 61.731,39.336 61.731,36.948 63.246,35.433 68.326,35.433 71.12,38.227 71.12,42.046 71.492,42.418 80.264,42.418 85.217,47.371 94.497,47.371 94.869,46.999 94.869,40.631 95.241,40.259 U3.2
NetD2_2: D2.2 G2.1 U4.2 | length 48
  Top Layer w0.635: G2.1 61.697,57.685 61.062,57.05 D2.2 84.963,51.435 93.599,60.071 U4.2
NetH_CAN_1: H_CAN.1 R1.2 U.6 | length 10.7
  Top Layer w0.508: U.6 109.855,13.335 110.236,12.954 117.221,12.954 H_CAN.1
NetH_CAN_2: H_CAN.2 R1.1 U.7 | length 13
  Top Layer w0.508: U.7 108.631,15.851 108.631,16.657 109.318,17.344 112.351,17.344 112.649,17.046 112.649,15.285 113.018,14.916 114.466,14.916 114.812,15.262 114.812,15.704 115.11,16.002 H_CAN.2
NetLED5V_1: LED5V.1 R2.1 | length 3.4
  Top Layer w0.635: LED5V.1 49.847,57.213 50.301,57.213 50.673,56.842 50.673,55.122 R2.1
NetLED12V_1: LED12V.1 R3.1 | length 2.8
  Top Layer w0.635: LED12V.1 49.721,49.657 50.419,48.959 R3.1@50.419,47.234
NetLED24V_1: LED24V.1 R4.1 | length 2.7
  Top Layer w0.635: R4.1 48.686,41.511 49.34,42.164 LED24V.1
NRST: P1.6
PA0: C2.2 P1.12 | length 53.9
  Top Layer w0.508: v2(67.059,28.349) 50.193,28.349 48.641,26.797 48.641,22.225 50.419,20.447 69.469,20.447 v1(69.596,20.574)
  Bottom Layer w0.508: P1.12@63.627,25.527 63.627,26.924 65.024,28.321 67.031,28.321 v2(67.059,28.349) ; v1(69.596,20.574) 71.18,18.99 71.18,18.355 C2.2
PA1: C2.3 P1.11 | length 7.2
  Bottom Layer w0.508: P1.11@63.627,22.987 63.895,22.987 64.266,22.616 64.379,22.616 C2.3
PA2: P1.14
PA3: P1.13
PA4: P1.16
PA5: P1.15
PA6: P1.18
PA7: P1.17
PA8: P2.43
PA9: P2.44
PA10: P2.41
PA13: P2.42
PA14: P2.39
PA15: P2.40
PB0: P1.22
PB1: P1.21
PB2: P1.24
PB3: P2.28
PB4: C5.4 P2.25 | length 68.8
  Top Layer w0.508: C5.4 C5.4@98.215,84.245 ; v1@103.251,66.294 103.251,69.784 104.804,71.337 113.247,71.337 114.681,72.771 114.681,79.292 110.026,83.947 v1(105.029,83.947)
  Bottom Layer w0.508: P2.25 81.407,68.275 83.515,66.167 102.271,66.167 ; C5.4 98.108,84.01 104.965,84.01 v1(105.029,83.947)
  other v1: 103.251,66.548
PB5: C5.2 P2.26 | length 16.3
  Bottom Layer w0.635: P2.26 83.437,78.357 89.787,78.357 92.964,81.534 C5.2
PB6: C4.4 P2.23 | length 72.6
  Top Layer w0.508: v1(72.644,80.137) 50.8,80.137 48.514,77.851 48.514,73.025 50.419,71.12 v1@78.59,71.12 ; v1@78.867,71.12 v1(78.994,71.12)
  Bottom Layer w0.508: P2.23 78.867,71.12 v1(78.994,71.12)
  Bottom Layer w0.635: v1(72.644,80.137) 77.343,80.137 78.105,80.899 C4.4
PB7: C4.2 P2.24 | length 9.6
  Bottom Layer w0.508: P2.24 79.058,76.327 83.185,80.454 C4.2
PB8: P2.19
PB9: P2.20
PB10: C3.3 P1.34 | length 57
  Top Layer w0.5: v2(94.361,28.575) 114.134,28.575 114.427,28.282 114.427,22.479 112.649,20.701 107.403,20.701 101.815,15.113 98.171,15.113 97.508,14.45 97.508,12.832 v1(97.375,12.7)
  Bottom Layer w0.5: P1.34@91.684,25.644 91.684,26.279 v2@93.767,28.362
  Bottom Layer w0.508: v1(97.375,12.7) 97.375,14.368 98.171,15.164 C3.3
  Bottom Layer w0.889: P1.34 P1.34@91.811,25.644 ; v2@93.767,28.362 94.148,28.362 v2(94.361,28.575)
PB11: C3.4 P1.35 | length 11.5
  Bottom Layer w0.508: P1.35@94.107,22.987 96.266,20.828 100.413,20.828 100.711,20.53 C3.4@100.711,16.647
PB12: P1.36
PB13: P1.37
PB14: P1.38
PB15: P1.39
PC0: P1.8
PC1: P1.7
PC2: P1.10
PC3: P1.9
PC4: P1.20
PC5: P1.19
PC6: P2.47 U2.11 | length 128.3
  Top Layer w0.508: v1(109.601,69.783) 109.74,69.644 121.079,69.644 v1(121.158,69.723)
  Bottom Layer w0.508: U2.11@73.254,5.915 73.254,3.2 73.787,2.667 111.887,2.667 121.285,12.065 121.285,69.596 v1(121.158,69.723) ; P2.47 109.474,73.66 109.474,69.91 v1(109.601,69.783)
PC7: P2.48 U2.12 | length 137.4
  Top Layer w0.508: v1(72.136,1.651) 80.391,1.651 81.407,2.667 v1(81.407,4.953)
  Bottom Layer w0.508: U2.12 71.984,1.803 v1(72.136,1.651) ; v1(81.407,4.953) 81.811,4.953 82.319,4.445 111.125,4.445 119.507,12.827 119.507,77.724 117.602,79.629 109.455,79.629 109.157,79.331 109.157,76.517 P2.48
PC8: P2.45
PC9: P2.46
PC10: P2.37
PC11: P2.38
PC12: P2.35
PC13: P2.12
PC14: P2.9
PC15: P2.10
PD0: P2.36 U.4 | length 126.6
  Top Layer w0.508: v1@105.283,80.645 109.413,80.645 113.191,76.867 113.191,73.247 112.089,72.145 104.469,72.145 100.076,67.752 100.076,66.04 102.057,64.059 118.846,64.059 119.144,63.761 119.144,10.775 117.368,8.999 111.423,8.999 111.125,9.297 U.4
  Bottom Layer w0.508: P2.36 98.425,80.645 v1@105.283,80.645
  other v1: 105.029,80.645
PD1: P2.33 U.1 | length 107.8
  Top Layer w0.508: U.1 107.315,9.017 109.075,7.257 118.471,7.257 121.412,10.198 121.412,64.77 119.634,66.548 v1@109.728,66.548
  Bottom Layer w0.508: P2.33 91.567,70.739 93.853,68.453 107.823,68.453 v1@109.728,66.548
  other v1: 109.601,66.548
PD2: P2.34
PD3: P2.31
PD4: P2.32
PD5: P2.29
PD6: P2.30
PD7: P2.27
PD8: P1.40
PD9: P1.41
PD10: P1.42
PD11: P1.43
PD12: P1.44
PD13: P1.45
PD14: P1.46
PD15: P1.47
PE0: P2.17
PE1: P2.18
PE2: P2.15
PE3: P2.16
PE4: P2.13
PE5: P2.14
PE6: P2.11
PE7: P1.25
PE8: P1.26
PE9: P1.27
PE10: P1.28
PE11: P1.29
PE12: P1.30
PE13: P1.31
PE14: P1.32
PE15: P1.33
PH0: P2.7
PH1: P2.8
VDD: P1.3 P1.4 P2.22 | length 2.5
  Bottom Layer w0.889: P1.3 P1.4
pads on no net: P1.48 U2.7 U2.8 U2.9 U2.10 U.5

## Text inside footprints (layer, text, board x,y; h text height)
P1: Top Overlay "2" at 48.514,25.019 h1.27; Top Overlay "1" at 48.514,22.479 h1.27; Top Overlay "49" at 114.046,22.479 h1.27; Top Overlay "50" at 114.046,25.019 h1.27
P2: Top Overlay "50" at 113.919,75.819 h1.27; Top Overlay "49" at 113.919,73.279 h1.27; Top Overlay "1" at 48.387,73.279 h1.27; Top Overlay "2" at 48.387,75.819 h1.27